# Altium PCB ecg-go_core.PcbDoc
Units mm, origin at the board's own origin, x right, y up, seen from the top; angles counter-clockwise.
Board outline 37 x 40 mm, 4 copper layers (Top Layer, L1, L2, Bottom Layer), stack 1.634 mm thick; 84 components, 76 nets, 289 pads, 134 vias.
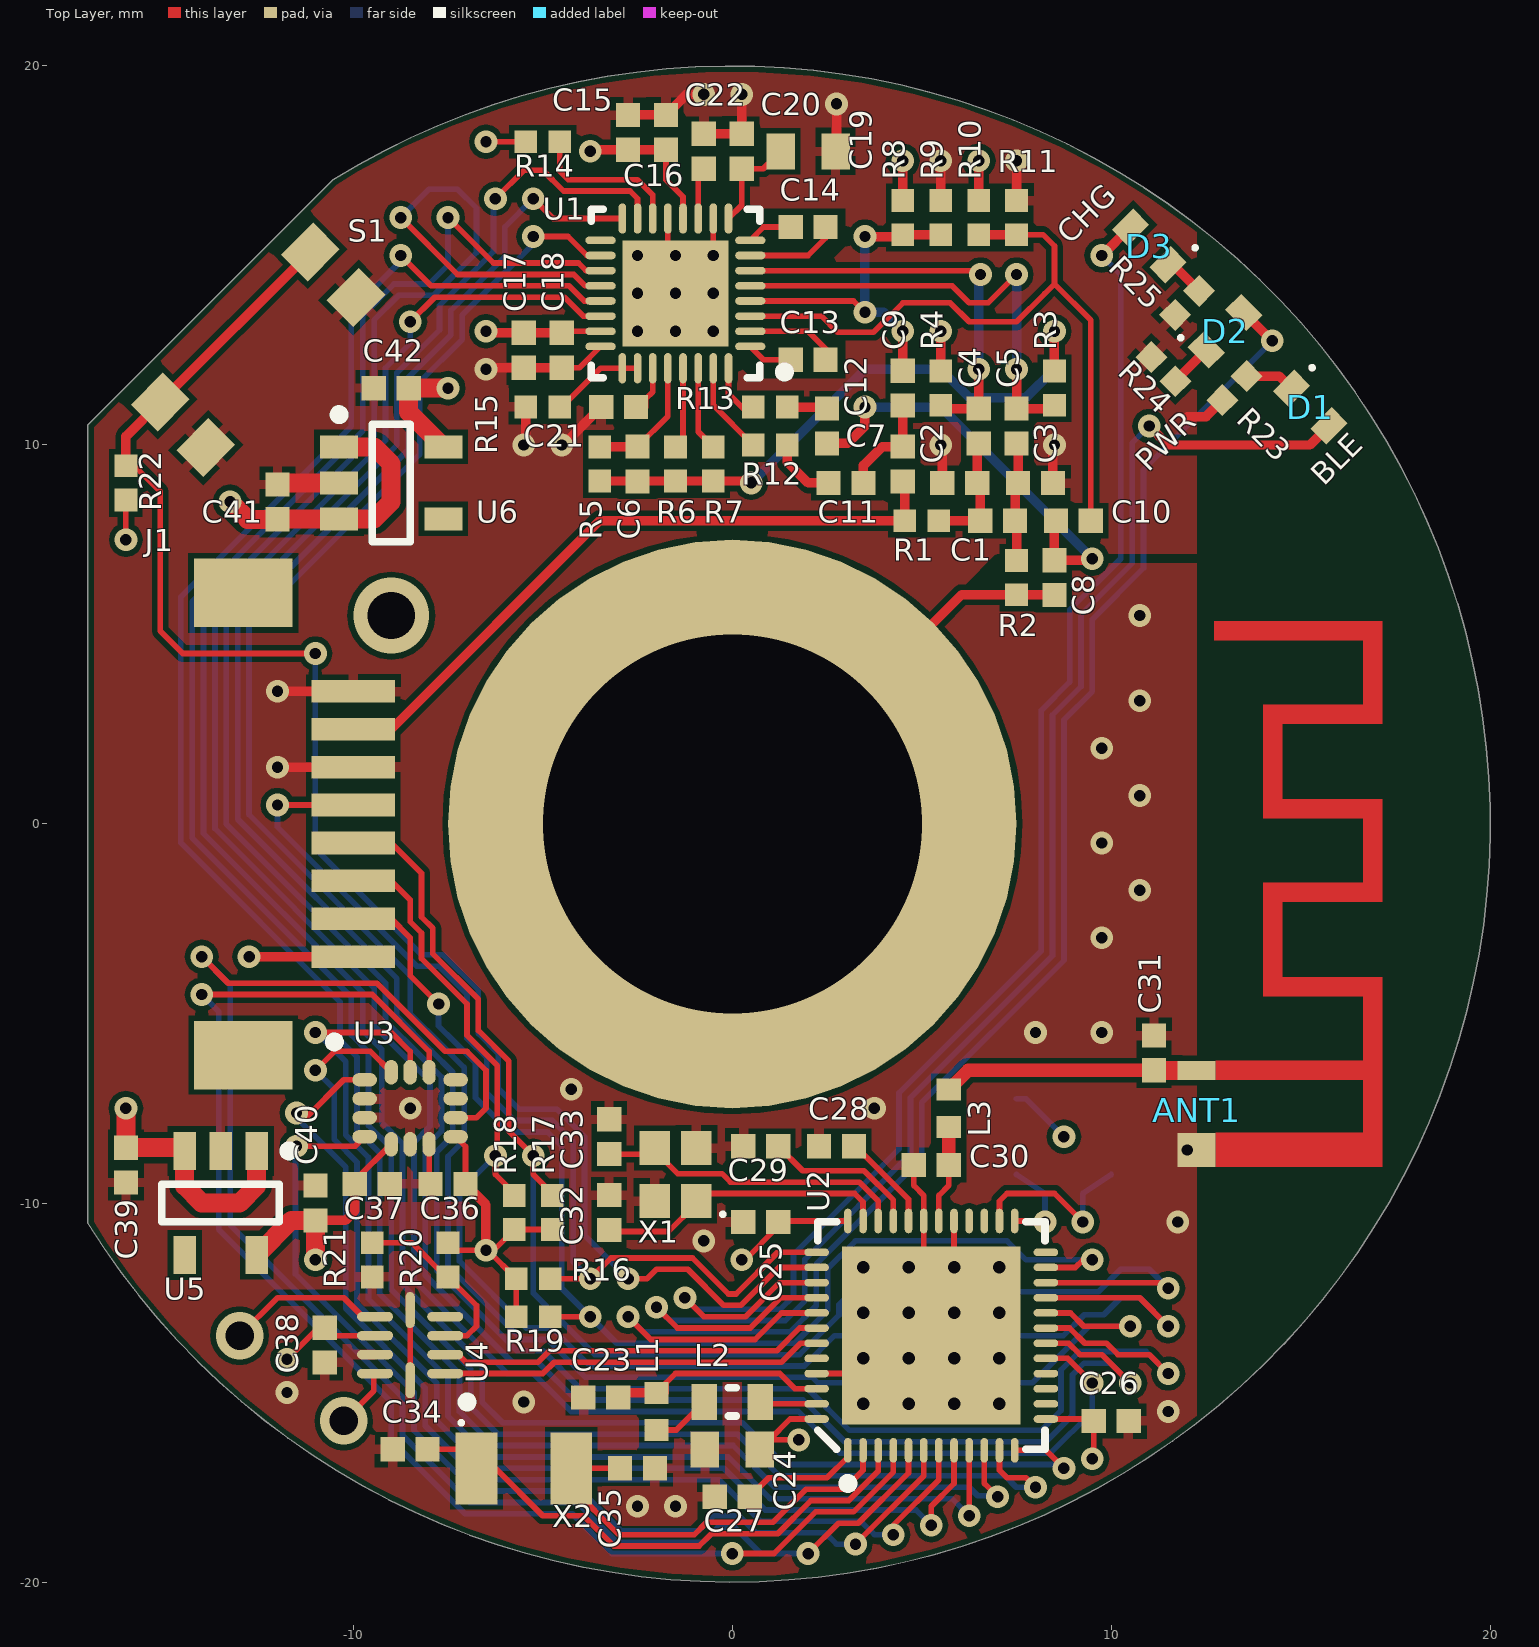
[diagram p0: Top Layer view]
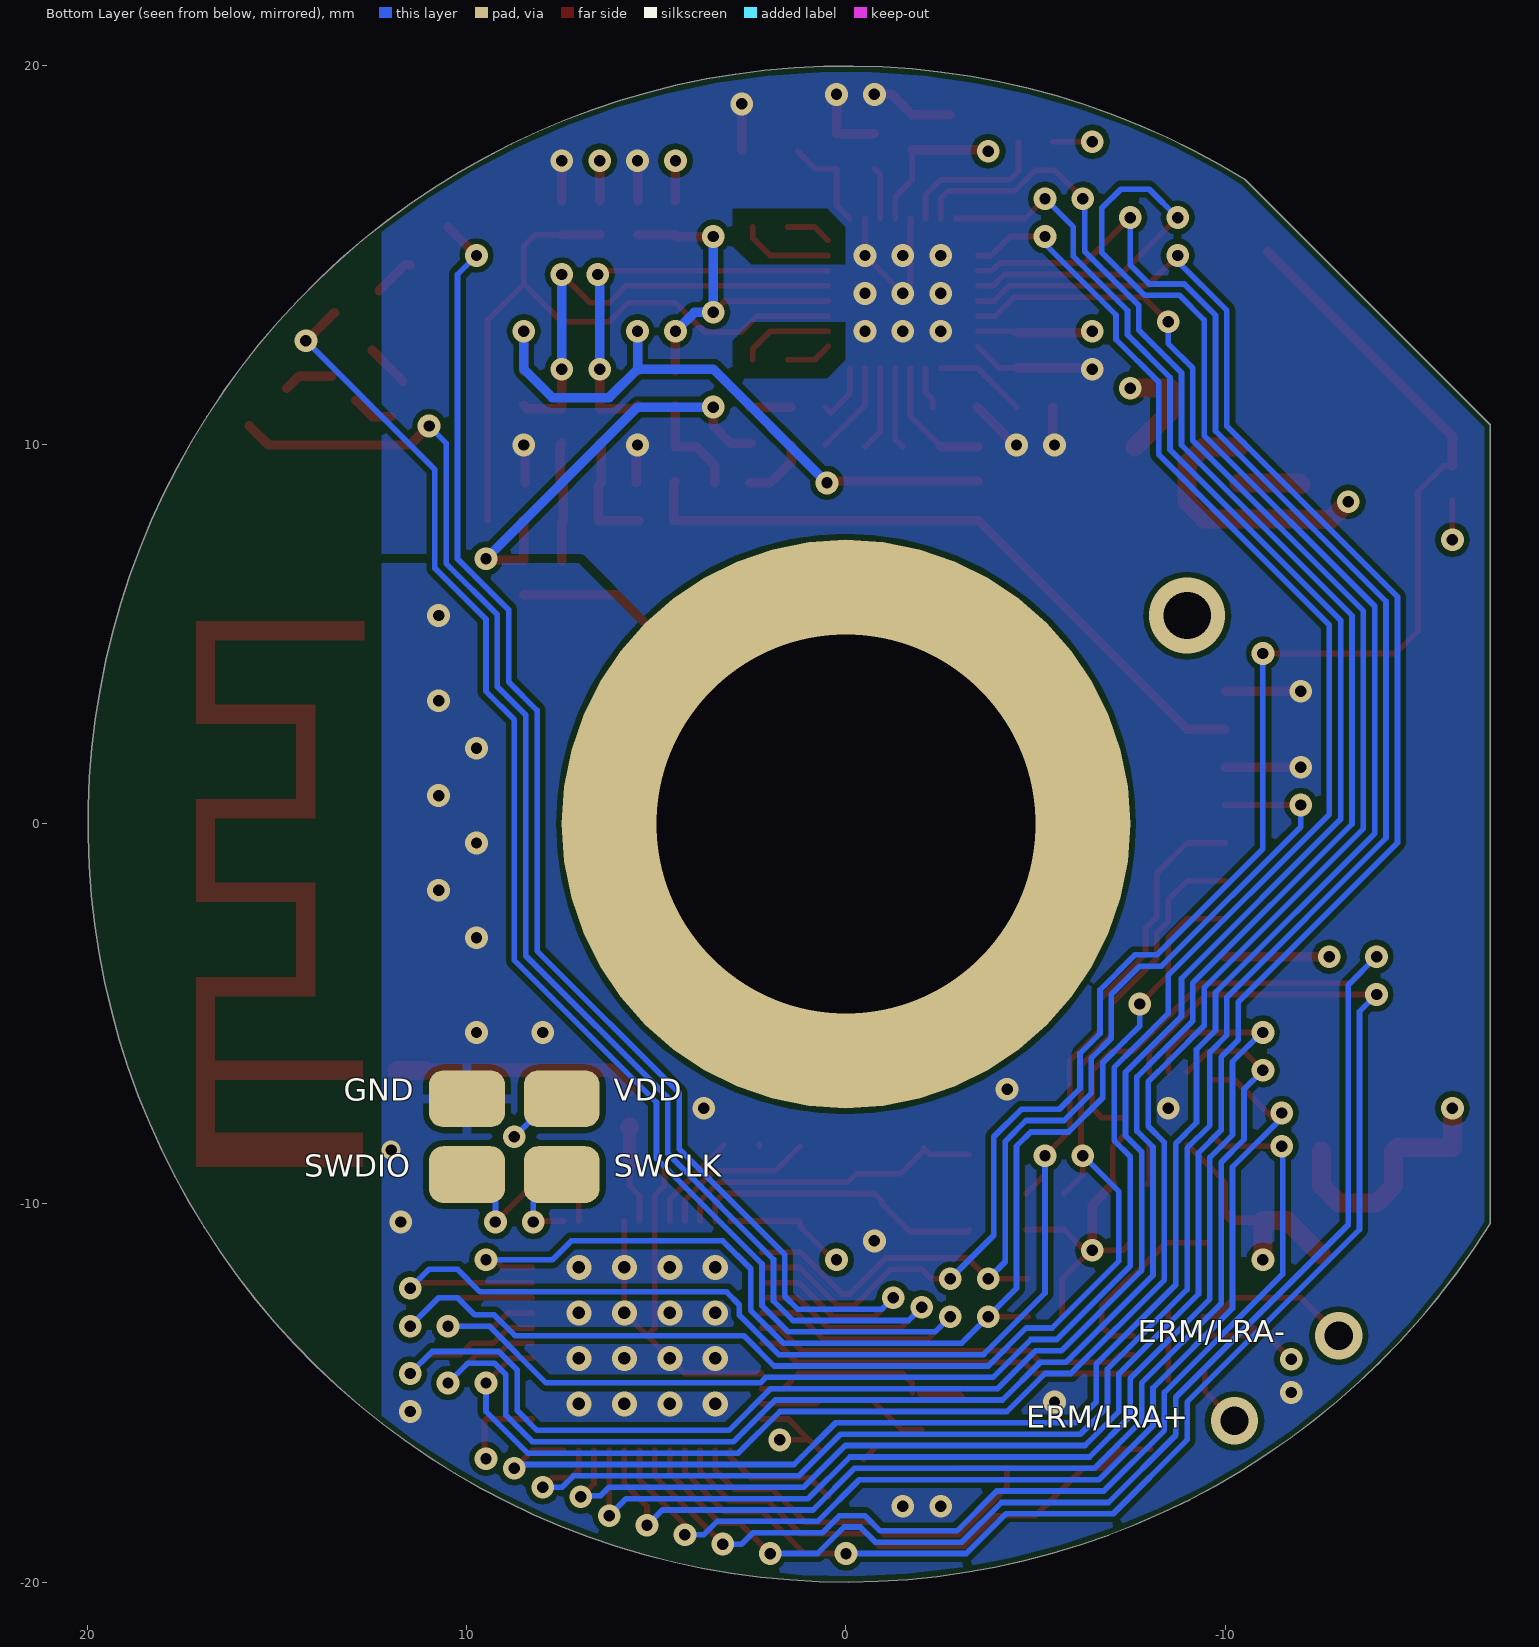
[diagram p1: Bottom Layer view, seen from below]
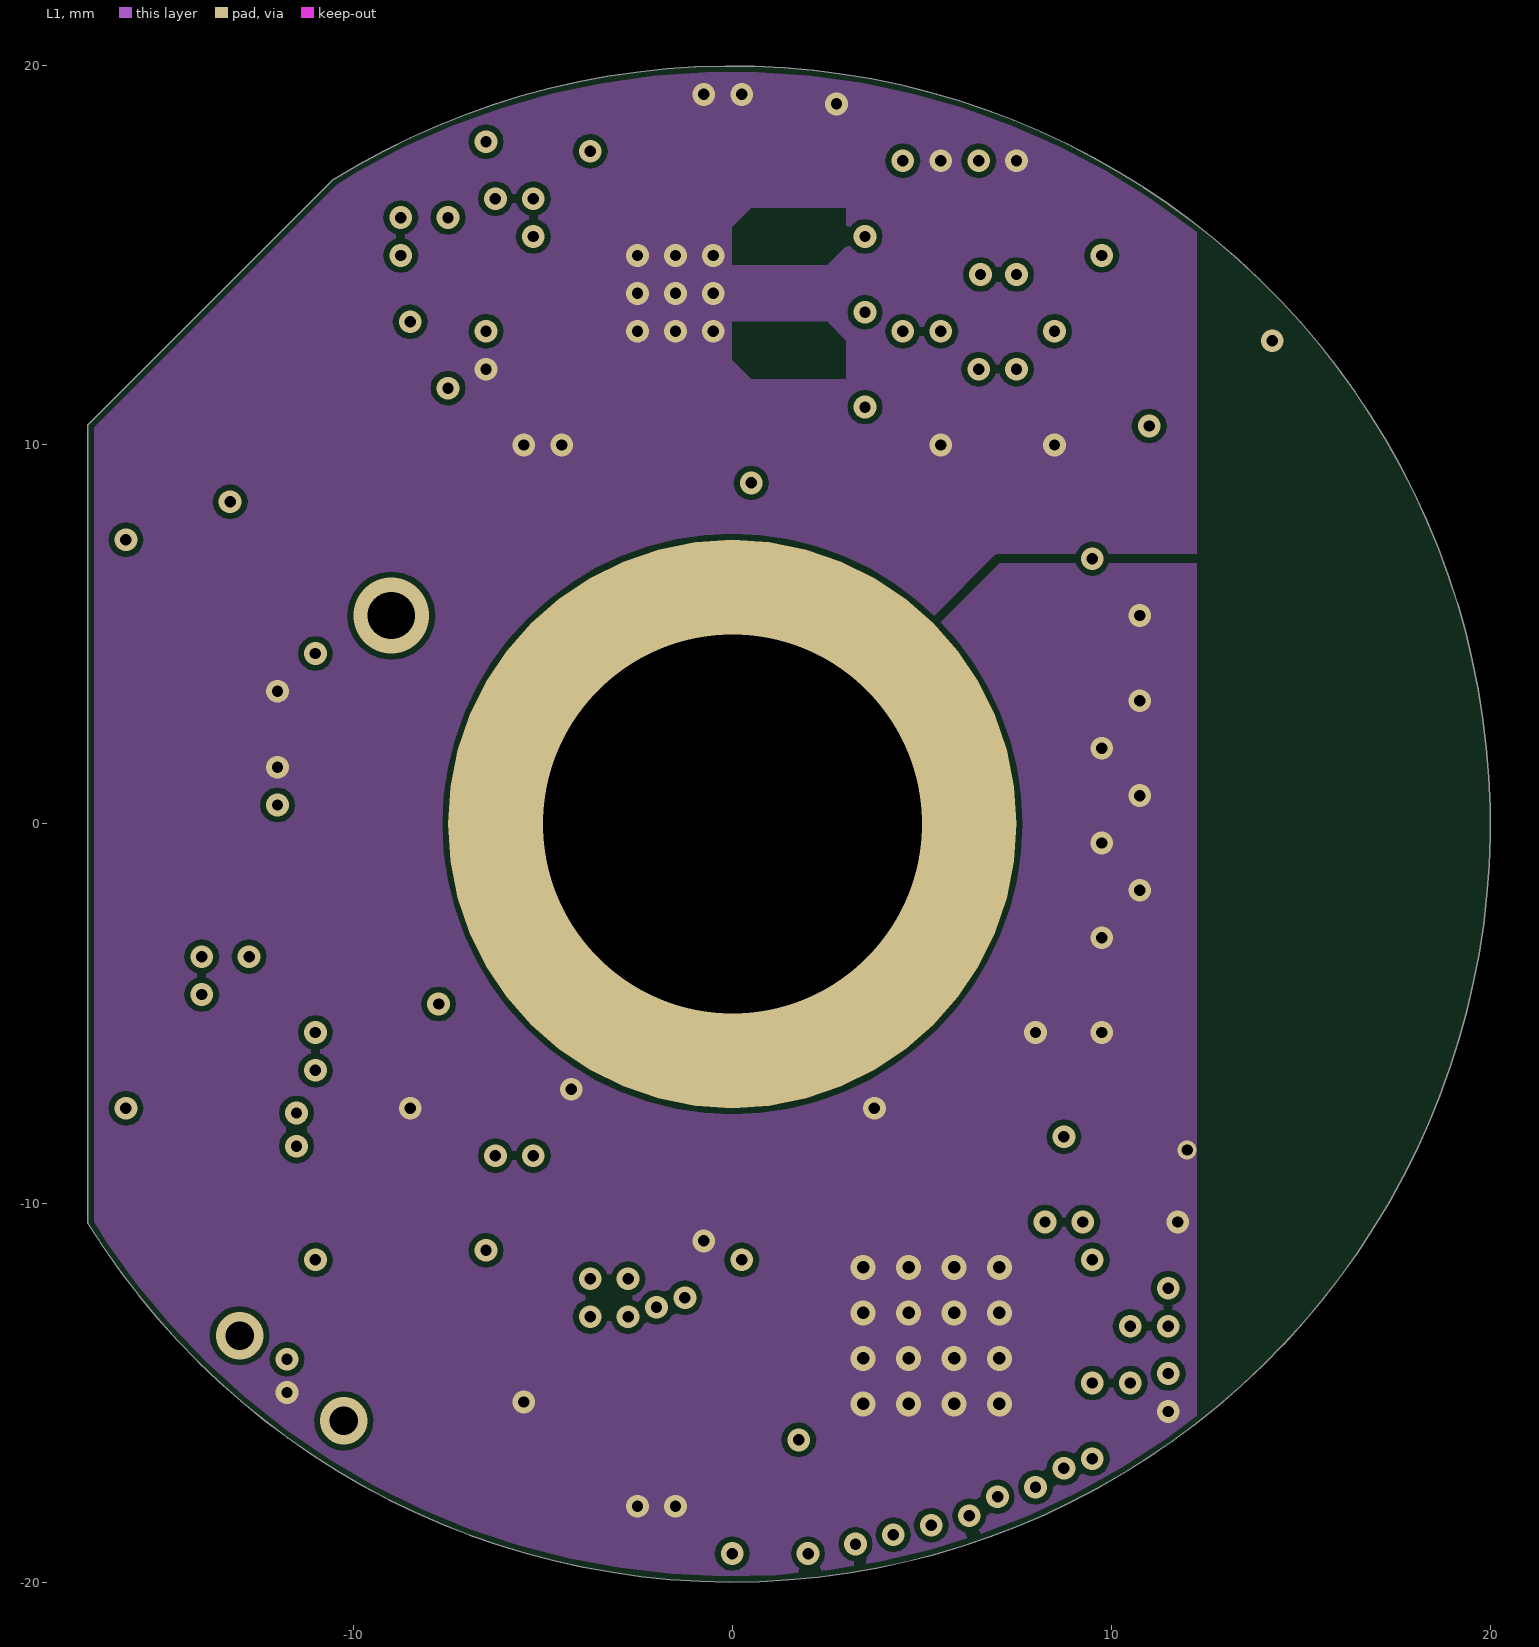
[diagram p2: L1]
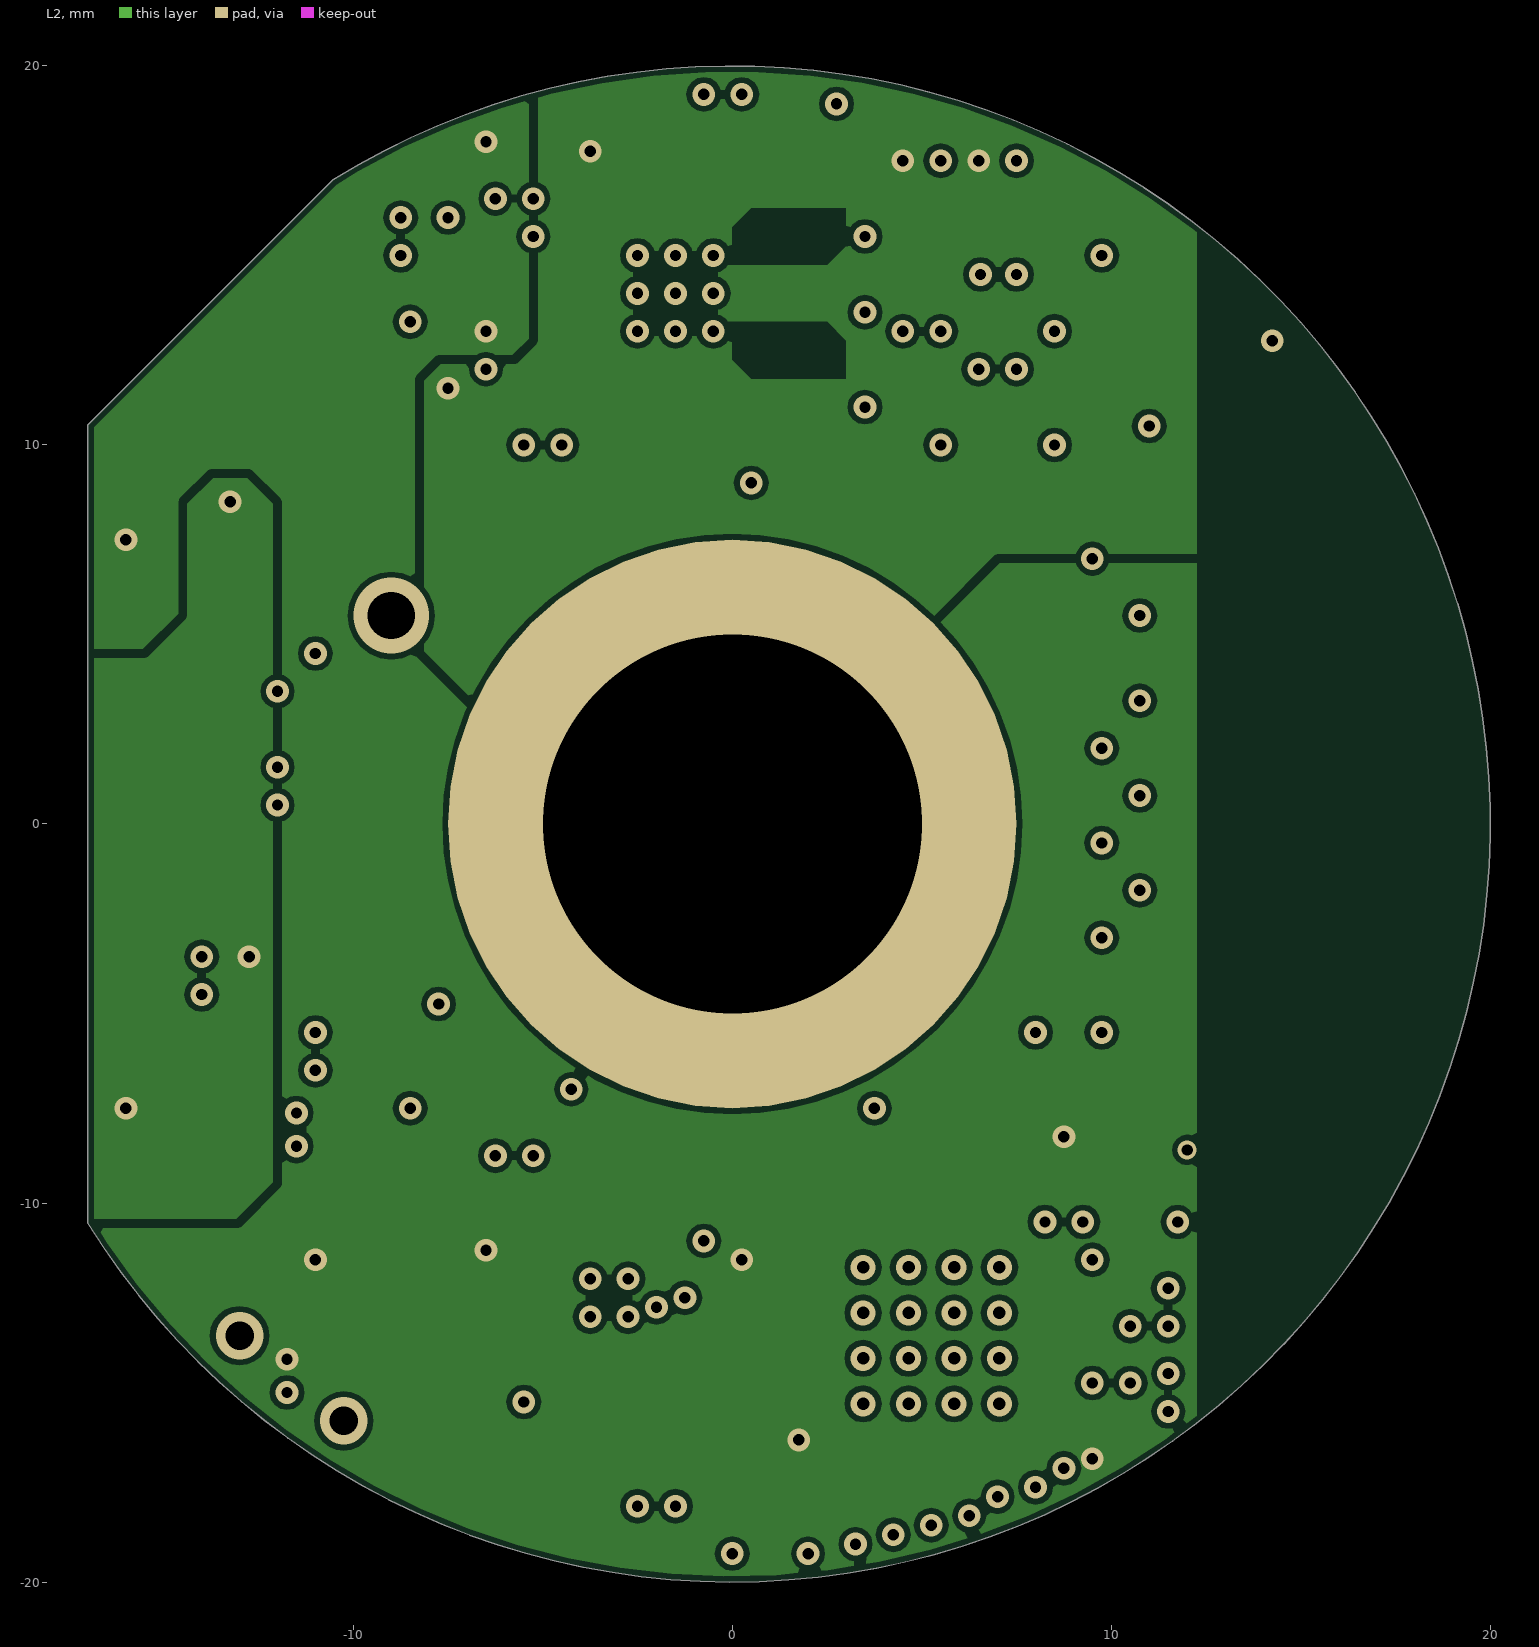
[diagram p3: L2]
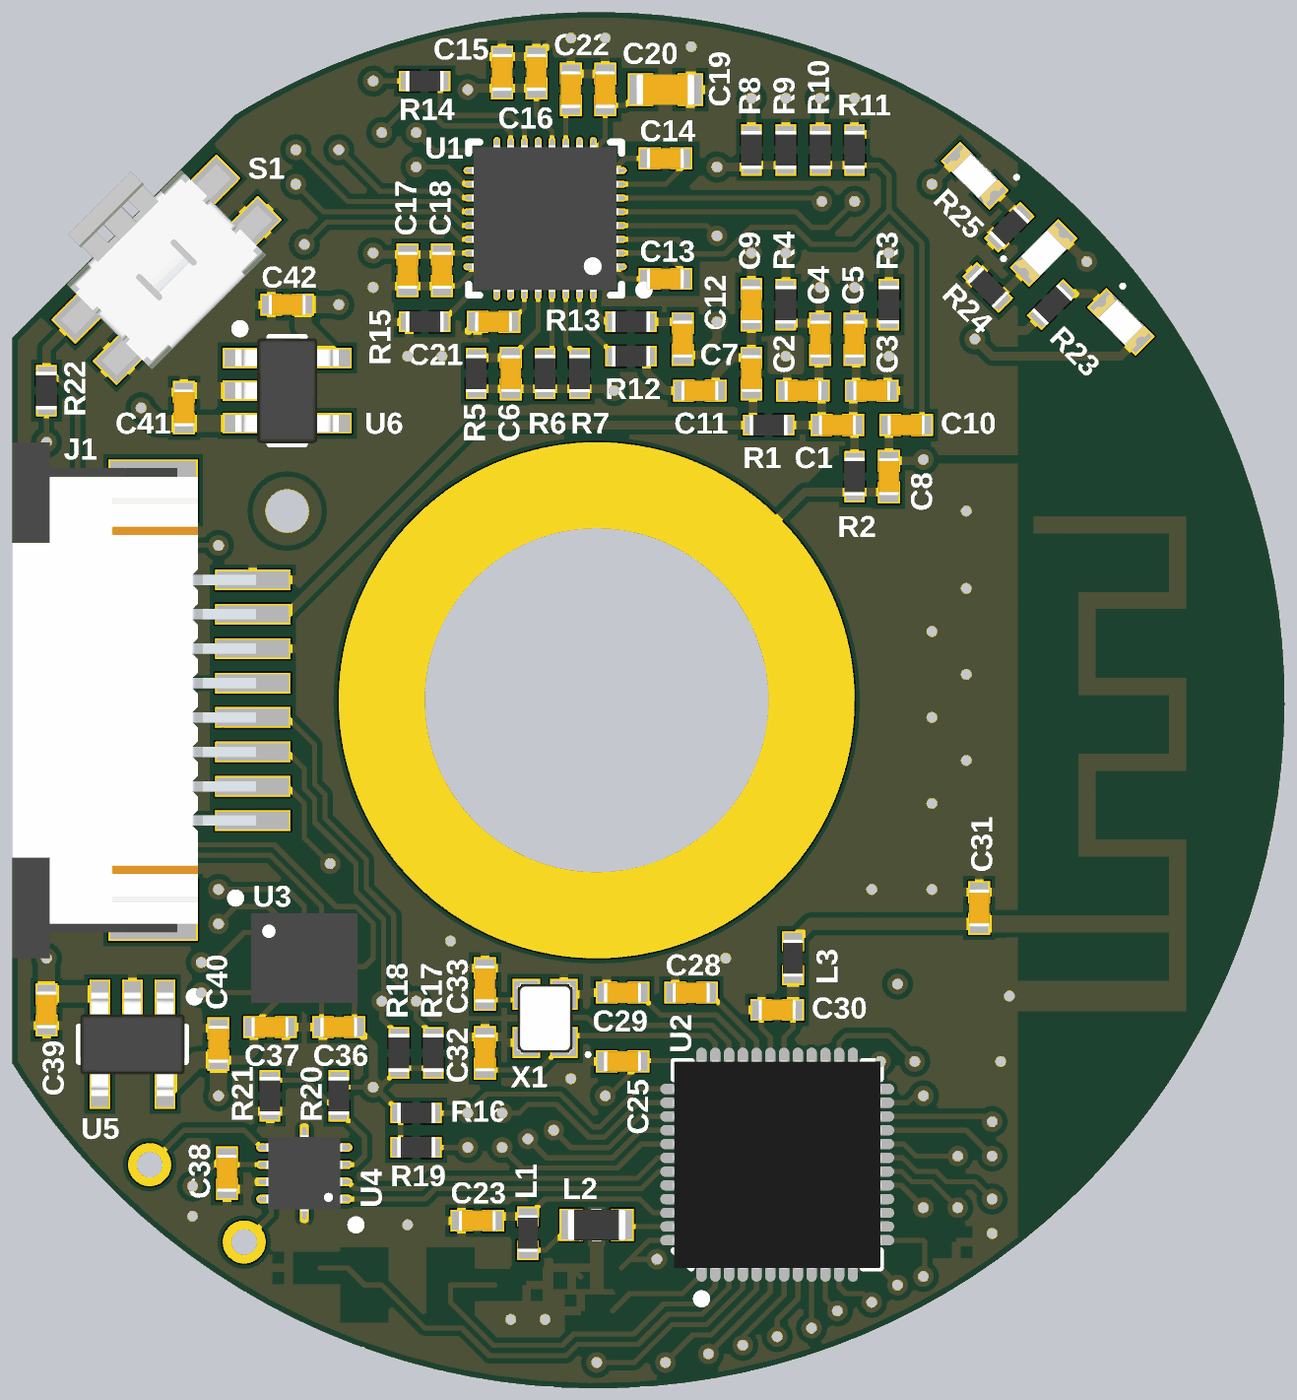
[diagram p4: 3D render of the assembled board from above, using the file's embedded part models]

## Layer stack, top to bottom
Top Solder: solder mask 0.0175, Solder Resist, Dk 3.5
Top Layer: signal copper 0.036
Dielectric 1: core 0.195, FR-4, Dk 4.2
L1: signal copper 0.036
Dielectric 3: prepreg 1.1, Dk 4.2
L2: signal copper 0.036
Dielectric 2: core 0.195, Dk 4.2
Bottom Layer: signal copper 0.036
Bottom Solder: solder mask 0.0175, Solder Resist, Dk 3.5

## Board outline
-17,-10.536 ccw(c0,0) -10.536,17 -17,10.536

## Design rules (kind name [scope] priority, off if disabled: settings)
BoardOutlineClearance [All] p1: gap=0.15
Clearance [All] p1: gap=0.15
ComponentClearance [All] p1: gap=0.25 collisioncheckmode=3 verticalgap=0.25 showdistances=TRUE
HoleSize [All] p1: absolutevalues=TRUE maxlimit=6.3 minlimit=0.3 maxpercent=80.000 minpercent=20.000
MinimumSolderMaskSliver [All] p1: minsoldermaskwidth=0.25
ParallelSegment [All] p1: limit=254 gap=0.254
PasteMaskExpansion [All] p1: expansion=0.05
PolygonConnect PolygonConnectANT [HasFootprint('ANT2.4GHZ_MIFA')] p1: connectstyle=Direct reliefconductorwidth=0.254 reliefentries=4 polygonreliefangle="90 Angle" airgapwidth=0.254
PolygonConnect PolygonConnectVias [IsVia] p2: connectstyle=Direct reliefconductorwidth=0.254 reliefentries=4 polygonreliefangle="90 Angle" airgapwidth=0.254
PolygonConnect [All] p3: connectstyle=Relief reliefconductorwidth=0.25 reliefentries=4 polygonreliefangle="90 Angle" airgapwidth=0.15
RoutingVias [All] p1: holewidth=0.3 width=0.6 viastyle="Through Hole" minholewidth=0.3 minwidth=0.6 maxholewidth=6.3 maxwidth=10.6
SilkToSilkClearance [All] p1: silktosilkclearance=0.25
SilkToSolderMaskClearance [IsPad] p1: minsilkscreentomaskgap=0.25 clearancetoexposedcopper=TRUE
SolderMaskExpansion [All] p1: expansion=0.05
Width [All] p1: maxlimit=10 minlimit=0.15 preferedwidth=0.25
24 further rules are at their usual default settings.

## Classes and differential pairs
component class U_supply: C39 C40 C41 C42 U5 U6
component class U_interface: C38 D1 D2 D3 D5 D6 D? R20 R21 R22 R23 R24 R25 R? S1 U4 U?
component class U_afe: C1 C2 C3 C4 C5 C6 C7 C8 C9 C10 C11 C12 C13 C14 C15 C16 C17 C18 C19 C20 C21 C22 R1 R2 R3 R4 R5 R6 R7 R8 R9 R10 R11 R12 R13 R14 R15 U1
component class U_controller: ANT1 C23 C24 C25 C26 C27 C28 C29 C30 C31 C32 C33 C34 C35 L1 L2 L3 R16 R17 R18 R19 U2 X1 X2 X?
component class U_imu: C36 C37 U3
component class core: J1

## Components (designator, comment, footprint, x,y, rotation, side; value= is the part's Value field where it differs from the comment)
ANT1 "2.4 GHz" ANT2.4GHZ_MIFA 12.25,-6.5 r90 top net-tie
C1 "2.2n" C0402 7,8 r0 top
C2 "100p" C0402 6,9 r180 top
C3 "100p" C0402 8,9 r180 top
C4 "1u" C0402 6.5,10.5 r90 top
C5 "1u" C0402 7.5,10.5 r90 top
C6 "1.5n" C0402 -2.5,9.5 r90 top
C7 "0.1u" C0402 4.5,9.5 r270 top
C8 "0.1u" C0402 8.5,6.5 r90 top
C9 "2.2n" C0402 4.5,11.5 r270 top
C10 "2.2n" C0402 9,8 r180 top
C11 "2.2n" C0402 3,9 r0 top
C12 "2.2n" C0402 2.5,10.5 r90 top
C13 "4.7n" C0402 2,12.25 r180 top
C14 "4.7n" C0402 2,15.75 r0 top
C15 "1u" C0402 -2.75,18.25 r270 top
C16 "0.1u" C0402 -1.75,18.25 r270 top
C17 "1u" C0402 -5.5,12.5 r90 top
C18 "0.1u" C0402 -4.5,12.5 r90 top
C19 "10u" C0603 2,17.75 r180 top
C20 "0.1u" C0402 0.25,17.75 r270 top
C21 "1u" C0402 -3,11 r0 top
C22 "1u" C0402 -0.75,17.75 r270 top
C23 "1u" C0402 -3.47,-15.129 r0 top
C24 "4.7u" C0603 0,-16.5 r0 top
C25 "100n" C0402 0.75,-10.5 r0 top
C26 "100n" C0402 10,-15.75 r180 top
C27 "100n" C0402 0,-17.75 r0 top
C28 "100p" C0402 2.75,-8.5 r0 top
C29 "100p" C0402 0.75,-8.5 r0 top
C30 "0.8p" C0402 5.25,-9 r180 top
C31 "0.8p" C0402 11.125,-6.04 r90 top
C32 "12p" C0402 -3.25,-10.25 r270 top
C33 "12p" C0402 -3.25,-8.25 r270 top
C34 "12p" C0402 -8.5,-16.5 r0 top
C35 "12p" C0402 -2.5,-17 r180 top
C36 "0.1u" C0402 -7.5,-9.5 r0 top
C37 "0.1u" C0402 -9.5,-9.5 r180 top
C38 "0.1u" C0402 -10.75,-13.75 r90 top
C39 "1u" C0402 -16,-9 r90 top
C40 "1u" C0402 -11,-10 r270 top
C41 "1u" C0402 -12,8.5 r270 top
C42 "1u" C0402 -9,11.5 r0 top
D1 "BLE" "WL-SMCW 0603" 15.25,11 r315 top
D2 "PWR" "WL-SMCW 0603" 13,13 r45 top
D3 "CHG" "WL-SMCW 0603" 11,15.25 r135 top
J1 "FFC Conn" WE68610814122 -17,0 r270 top
L1 "15n" L0402 -2,-15.5 r90 top
L2 "10u" L0603 0,-15.25 r180 top
L3 "3.9n" L0402 5.71,-7.5 r90 top
R1 "40.2k" R0402 5,8 r180 top
R2 "40.2k" R0402 7.5,6.5 r270 top
R3 "4.7M" R0402 8.5,11.5 r270 top
R4 "4.7M" R0402 5.5,11.5 r270 top
R5 "0" R0402 -3.5,9.5 r90 top
R6 "10M" R0402 -1.5,9.5 r90 top
R7 "0" R0402 -0.5,9.5 r270 top
R8 "10M" R0402 4.5,16 r90 top
R9 "10M" R0402 5.5,16 r90 top
R10 "10M" R0402 6.5,16 r90 top
R11 "10M" R0402 7.5,16 r90 top
R12 "40.2k" R0402 1,10 r0 top
R13 "40.2k" R0402 1,11 r0 top
R14 "40.2k" R0402 -5,18 r180 top
R15 "40.2k" R0402 -5,11 r0 top
R16 "10k" R0402 -5.25,-12 r180 top
R17 "10k" R0402 -4.75,-10.25 r270 top
R18 "10k" R0402 -5.75,-10.25 r270 top
R19 "10k" R0402 -5.25,-13 r180 top
R20 "10M" R0402 -7.5,-11.5 r90 top
R21 "0" R0402 -9.5,-11.5 r90 top
R22 "100k" R0402 -16,9 r270 top
R23 "1k" R0402 13.25,11.5 r45 top
R24 "4.7k" R0402 11.375,12 r315 top
R25 "4.7k" R0402 12,13.75 r45 top
S1 "WE434351045816" WE434351045816 -13.75,13.75 r225 top
U1 "ADS1292R" ADS129x_QFN -1.5,14 r180 top
U2 "nRF52832-QFAA" QFN40P600X600X90-48N 5.25,-13.5 r90 top
U3 "LSM6DS3" LSM6DS3 -8.5,-7.5 r0 top
U4 "DRV2603" DRV2603 -8.5,-13.75 r180 top
U5 "LP5907-3.3" LP5907 -13.5,-10 r270 top
U6 "LP5907-3.3" LP5907 -9,9 r0 top
X1 "32 MHz" CX2016DB32000D0FLJCC -1.5,-9.25 r90 top
X2 "32.768 kHz" ABS07-32.768KHZ-9-T -5.5,-17 r0 top

## Footprints (in the part's own frame and the unit in brackets; to place one, negate y for a bottom-side part, rotate by r counter-clockwise, add the part's x,y. Pads: shape width x height; smd on the part's side, far side on the other; paste and mask are expansions set on the pad)
ABS07-32.768KHZ-9-T [mm] "Crystal - 32.768 kHz, 9 pF, 70 kOhm"
  rect 1.1x1.9 smd paste-0.05 mask+0.05: 1(-1.25,0) 2(1.25,0)
  silkscreen extent -1.7,1.15 -1.6,1.25, body extent -1.6,-0.75 1.6,0.75, height 0.88
ADS129x_QFN [mm] "QFN, 32-Leads, Body 4,00x4,00mm, Pitch 0,40mm, Thermal Pad 2,80x2,80mm, IPC Medium Density"
  oval 0.8x0.2 smd paste-0.04 mask+0.05: 1(-1.975,1.4) 2(-1.975,1) 3(-1.975,0.6) 4(-1.975,0.2) 5(-1.975,-0.2) 6(-1.975,-0.6) 7(-1.975,-1) 8(-1.975,-1.4) 17(1.975,-1.4) 18(1.975,-1) 19(1.975,-0.6) 20(1.975,-0.2) 21(1.975,0.2) 22(1.975,0.6) 23(1.975,1) 24(1.975,1.4)
  oval 0.2x0.8 smd paste-0.04 mask+0.05: 9(-1.4,-1.975) 10(-1,-1.975) 11(-0.6,-1.975) 12(-0.2,-1.975) 13(0.2,-1.975) 14(0.6,-1.975) 15(1,-1.975) 16(1.4,-1.975) 25(1.4,1.975) 26(1,1.975) 27(0.6,1.975) 28(0.2,1.975) 29(-0.2,1.975) 30(-0.6,1.975) 31(-1,1.975) 32(-1.4,1.975)
  rect 2.8x2.8 smd paste-2.8 mask+0.05: 33(0,0)
  silkscreen extent -3,-2.22 2.22,2.22, body extent -2.12,-2.12 2.12,2.12, height 1
ANT2.4GHZ_MIFA [mm] "Antenna - Meandered Inverted F Antenna (IFA)"
  rect 0.5x1 smd paste-0.5: 1(0,0)
  rect 0.9x1 smd paste-0.9: 2(-2.1,0)
  Top Layer region: -2.55,-0.5 -2.55,-4.9 2.45,-4.9 2.45,-2.26 4.45,-2.26 4.45,-4.9 7.15,-4.9 7.15,-2.26 9.15,-2.26 9.15,-4.9 11.85,-4.9 11.85,-0.46 11.35,-0.46 11.35,-4.4 9.65,-4.4 9.65,-1.76 6.65,-1.76 6.65,-4.4 4.95,-4.4 4.95,-1.76 1.95,-1.76 1.95,-4.4 0.25,-4.4 0.25,-0.5 -0.25,-0.5 -0.25,-4.4 -1.65,-4.4 -1.65,-0.5
C0402 [mm] "Chip Capacitor, 2-Leads, Body 1,00x0,50mm, IPC Medium Density"
  rect 0.64x0.64 smd paste-0.05 mask+0.05: 1(-0.46,0) 2(0.46,0)
  body extent -0.55,-0.3 0.55,0.3, height 0.4
C0603 [mm] "Chip Capacitor, 2-Leads, Body 1,60x0,80mm, IPC Medium Density"
  rect 0.75x0.95 smd paste-0.05 mask+0.05: 1(-0.725,0) 2(0.725,0)
  body extent -0.85,-0.45 0.85,0.45, height 0.5
CX2016DB32000D0FLJCC [mm] "Crystal - 32 MHz, 8 pF, 80 ohm"
  rect 0.9x0.8 smd paste-0.05 mask+0.05: 1(-0.7,-0.55) 2(0.7,-0.55) 3(0.7,0.55) 4(-0.7,0.55)
  silkscreen extent -1.1,-1.3 -1,-1.2, body extent -1.02,-0.82 1.03,0.83, height 0.39
DRV2603 [mm] "IC - Haptic Drive, ERM/LRA, Auto Resonance"
  oval 0.95x0.25 smd paste-0.05 mask+0.05: 1(-0.925,0.75) 2(-0.925,0.25) 3(-0.925,-0.25) 4(-0.925,-0.75) 6(0.925,-0.75) 7(0.925,-0.25) 8(0.925,0.25) 9(0.925,0.75)
  oval 0.25x0.95 smd paste-0.05 mask+0.05: 5(0,-0.925) 10(0,0.925)
  silkscreen extent -1.63,1.38 -1.38,1.62, body extent -1.1,-1.1 1.1,1.1, height 0.8
L0402 [mm] "Chip Inductor, 2-Leads, Body 1,00x0,50mm, IPC Medium Density"
  rect 0.58x0.64 smd paste-0.05 mask+0.05: 1(-0.49,0) 2(0.49,0)
  body extent -0.55,-0.3 0.55,0.3, height 0.4
L0603 [mm] "Chip Inductor, 2-Leads, Body 1,60x0,80mm, IPC Medium Density"
  rect 0.68x0.94 smd paste-0.05 mask+0.05: 1(-0.74,0) 2(0.74,0)
  silkscreen extent -0.1,-0.37 0.1,0.37, body extent -0.85,-0.45 0.85,0.45, height 0.5
LP5907 [mm] "SOT23, 5-Leads, Body 2,90x2,80mm, Pitch 0,95mm, IPC Medium Density"
  rect 1x0.6 smd paste-0.05 mask+0.05: 1(-1.375,0.95) 2(-1.375,0) 3(-1.375,-0.95) 4(1.375,-0.95) 5(1.375,0.95)
  silkscreen extent -1.5,-1.55 0.5,1.93, body extent -1.5,-1.53 1.5,1.53, height 1.45
LSM6DS3 [mm] "IC - Inertial Measurement Unit, Accelerometer, Gyroscope, 6D"
  oval 0.65x0.35 smd paste-0.05 mask+0.025: 1(-1.2,0.75) 2(-1.2,0.25) 3(-1.2,-0.25) 4(-1.2,-0.75) 8(1.2,-0.75) 9(1.2,-0.25) 10(1.2,0.25) 11(1.2,0.75)
  oval 0.35x0.65 smd paste-0.05 mask+0.025: 5(-0.5,-0.95) 6(0,-0.95) 7(0.5,-0.95) 12(0.5,0.95) 13(0,0.95) 14(-0.5,0.95)
  silkscreen extent -2.12,1.63 -1.88,1.87, body extent -1.55,-1.3 1.55,1.3, height 0.86
QFN40P600X600X90-48N [mm]
  oval 0.65x0.2 smd: 1(-3.025,2.2) 2(-3.025,1.8) 3(-3.025,1.4) 4(-3.025,1) 5(-3.025,0.6) 6(-3.025,0.2) 7(-3.025,-0.2) 8(-3.025,-0.6) 9(-3.025,-1) 10(-3.025,-1.4) 11(-3.025,-1.8) 12(-3.025,-2.2) 25(3.025,-2.2) 26(3.025,-1.8) 27(3.025,-1.4) 28(3.025,-1) 29(3.025,-0.6) 30(3.025,-0.2) 31(3.025,0.2) 32(3.025,0.6) 33(3.025,1) 34(3.025,1.4) 35(3.025,1.8) 36(3.025,2.2)
  oval 0.2x0.65 smd: 13(-2.2,-3.025) 14(-1.8,-3.025) 15(-1.4,-3.025) 16(-1,-3.025) 17(-0.6,-3.025) 18(-0.2,-3.025) 19(0.2,-3.025) 20(0.6,-3.025) 21(1,-3.025) 22(1.4,-3.025) 23(1.8,-3.025) 24(2.2,-3.025) 37(2.2,3.025) 38(1.8,3.025) 39(1.4,3.025) 40(1,3.025) 41(0.6,3.025) 42(0.2,3.025) 43(-0.2,3.025) 44(-0.6,3.025) 45(-1,3.025) 46(-1.4,3.025) 47(-1.8,3.025) 48(-2.2,3.025)
  rect 4.7x4.7 smd: 49(0,0)
  silkscreen extent -4.02,-3 3,3, body extent -3.02,-3.02 3.02,3.02, height 0.86
R0402 [mm] "Chip Resistor, 2-Leads, Body 1,00x0,50mm, IPC Medium Density"
  rect 0.6x0.6 smd paste-0.05 mask+0.05: 1(-0.45,0) 2(0.45,0)
  body extent -0.55,-0.3 0.55,0.3, height 0.4
WE68610814122 [mm] "Conn - FFC, 8 Pin, 1 mm Pitch, Bottom Contacts, SMD, Right Angle, Slide Lock"
  rect 0.6x2.2 smd paste-0.05 mask+0.05: 1(-3.5,7) 2(-2.5,7) 3(-1.5,7) 4(-0.5,7) 5(0.5,7) 6(1.5,7) 7(2.5,7) 8(3.5,7)
  rect 1.8x2.6 smd paste-0.05 mask+0.05: ""(-6.1,4.1) ""(6.1,4.1)
  body extent -7.5,0 7.5,7.1, height 3.01
WE434351045816 [mm] "Switch - Tactile, Off-Mom, SPST, Side-Actuated"
  rect 1.2x1 smd paste-0.05 mask+0.05: 1(2.8,2.6) 2(2.8,0.9) 3(-2.8,2.6) 4(-2.8,0.9)
  body extent -3.2,-1 3.2,3.5, height 1.64
"WL-SMCW 0603" [mm] "Chip Diode, 2-Leads, Body 1,60x0,80mm, IPC Medium Density"
  rect 0.6x0.8 smd paste-0.05 mask+0.05: 1(-0.7,0) 2(0.7,0)
  silkscreen extent -0.75,0.72 -0.65,0.82, body extent -0.8,-0.4 0.8,0.4, height 0.7

## Part data
ANT1: library part "Antenna 2.4 GHz", "Antenna - Meandered Inverted F Antenna (IFA)"
C1 C2 C3 C4 C5 C6 C7 C8 C9 C10 C11 C12 C13 C14 C15 C16 C17 C18 C19 C20 C21 C22 C23 C24 C25 C26 C27 C28 C29 C30 C31 C32 C33 C34 C35 C36 C37 C38 C39 C40 C41 C42: library part Capacitor, "Capacitor"
D1: library part 150060BS75000, "LED - Blue, 3.2V, 0603"
D2: library part 150060VS75000, "LED - Green, 2V, 0603"
D3: library part 150060YS75000, "LED - Yellow, 2V, 0603"
J1: library part WE68610814122, "Conn - FFC, 8 Pin, 1 mm Pitch, Top Contacts, SMD, Right Angle, Slide Lock"
L1 L2 L3: library part Inductor, "Inductor"
R1 R2 R3 R4 R5 R6 R7 R8 R9 R10 R11 R12 R13 R14 R15 R16 R17 R18 R19 R20 R21 R22 R23 R24 R25: library part Resistor, "Resistor"
S1: "Switch - Tactile, Off-Mom, SPST, Side-Actuated"
U1: "IC - Analog Front End - Medical"
U2: "Multi-protocol Bluetooth Low Energy, ANT and 2.4GHz proprietary system-on-chip"
U3: "IC - Inertial Measurement Unit, Accelerometer, Gyroscope, 6D"
U4: "IC - Haptic Drive, ERM/LRA, Auto Resonance"
U5 U6: "IC - Voltage Regulator, Linear"
X1: library part CX2016DB32000D0FLJCC, "Crystal - 32 MHz, 8 pF, 80 ohm"
X2: library part ABS07-32.768KHZ-9-T, "Crystal - 32.768 kHz, 9 pF, 70 kOhm"

## Free pads (board coordinates)
  round 15 hole 10: ""(0,0)
  rrect50% 2x1.5 smd far side paste-0.05 mask+0.05: ""(7.5,-9.25) ""(7.5,-7.25) ""(10,-9.25) ""(10,-7.25)

## Via types
v1: diameter 0.6, hole 0.3, Top Layer to Bottom Layer, tented both sides, 93 vias
v2: diameter 0.6, hole 0.3, Top Layer to Bottom Layer, tented top, 21 vias
v3: diameter 0.66, hole 0.33, Top Layer to Bottom Layer, tented both sides, 16 vias
v4: diameter 1.25, hole 0.75, Top Layer to Bottom Layer, 2 vias
v5: diameter 0.5, hole 0.3, Top Layer to Bottom Layer, tented both sides, 1 vias
v6: diameter 2, hole 1.25, Top Layer to Bottom Layer, 1 vias

## Nets (pads, with @x,y where several pads share a name; then routed paths per layer and width w, separated by ;. In a path a pad name is that pad's centre, name@x,y a point inside that pad or via, vN(x,y) a via of type N, cw(c..) or ccw(c..) an arc to the next point about the centre after c; other vN are vias at no path point)
AFE_CLK: U1.17
AFE_CLKSEL: R14.1 U1.14 | length 4.1
  Top Layer w0.15: R14.1 -4.55,17.224 -4.326,17 -2.5,17 -2.1,16.6 U1.14
AFE_CS: U1.18 U2.20 | length 57
  Top Layer w0.15: v1(-5.25,15.5) -4.335,15.5 -3.835,15 U1.18 ; U2.20 8.923,-12.9 9.273,-13.25 v2(10.5,-13.25)
  Bottom Layer w0.15: v1(-5.25,15.5) -5.25,15.303 -7.125,13.428 -7.125,12.784 -8.25,11.659 -8.25,9.75 -12.75,5.25 -12.75,0.25 -8.5,-4 -8.5,-5 -7.649,-5.851 -7.075,-6.425 -7.075,-8.348 -7.5,-8.773 -7.5,-11.659 -5.559,-13.6 -4.877,-13.6 -3.877,-14.6 2.115,-14.6 2.26,-14.745 7.914,-14.745 9.409,-13.25 v2(10.5,-13.25)
AFE_DIN: U1.19 U2.11 | length 59.8
  Top Layer w0.15: v1(-7.5,16) -6.3,14.8 -4.059,14.8 -3.859,14.6 U1.19 ; U2.11 7.05,-17.05 7.25,-17.25 7.75,-17.25 v2(8,-17.5)
  Bottom Layer w0.15: v1(-7.5,16) -7.5,14.75 -8,14.25 -8.924,14.25 -9.75,13.424 -9.75,10.371 -14.25,5.871 -14.25,-0.371 -10.05,-4.571 -10.05,-5.571 -9.6,-6.021 -9.6,-7.953 -9,-8.553 -9,-12.28 -6.9,-14.38 -6.9,-15.38 -6.18,-16.1 0.146,-16.1 1.246,-17.2 7.192,-17.2 7.492,-17.5 v2(8,-17.5)
AFE_DOUT: U1.21 U2.10 | length 58.2
  Top Layer w0.15: v1(-8.75,15) -7.95,14.2 -4.307,14.2 -3.907,13.8 U1.21 ; U2.10 6.65,-17.4 v2(7,-17.75)
  Bottom Layer w0.15: v1(-8.75,15) -8.75,14.849 -10.05,13.549 -10.05,10.496 -14.55,5.996 -14.55,-0.496 -10.35,-4.696 -10.35,-5.696 -9.9,-6.146 -9.9,-8.077 -9.3,-8.677 -9.3,-12.404 -7.2,-14.504 -7.2,-15.504 -6.304,-16.4 0.021,-16.4 1.121,-17.5 6.25,-17.5 6.475,-17.725 6.975,-17.725 v2(7,-17.75)
AFE_DRDY: U1.22 U2.17 | length 57.9
  Top Layer w0.15: v1(-8.5,13.25) -7.85,13.9 -4.432,13.9 -3.932,13.4 U1.22 ; U2.17 8.85,-14.1 v2(9.5,-14.75)
  Bottom Layer w0.15: v1(-8.5,13.25) -8.5,12.682 -9.15,12.032 -9.15,10.123 -13.65,5.623 -13.65,-0.123 -9.45,-4.323 -9.45,-5.323 -8.549,-6.224 -7.975,-6.798 -7.975,-7.975 -8.4,-8.4 -8.4,-12.032 -5.932,-14.5 -5.25,-14.5 -4.25,-15.5 1.742,-15.5 2.842,-16.6 8.4,-16.6 9.5,-15.5 v2(9.5,-14.75)
AFE_ECG_BIAS: C6.1 R3.1 R4.1 R5.1 R6.1 R7.2 | length 18
  Top Layer w0.15: R5.1 R5.1@-3.49,9.04 ; C6.1 C6.1@-2.49,9.05
  Top Layer w0.25: R5.1@-3.49,9.05 C6.1@-2.5,9.05 ; C6.1@-2.49,9.05 R6.1 R7.2 0.45,9.05 v1(0.5,9) ; R4.1 v1(5.5,13) ; R3.1 v1(8.5,13)
  Bottom Layer w0.25: v1(0.5,9) 3.5,12 5.5,12 ; v1(5.5,13) 5.5,12 ; v1(8.5,13) 8.5,12 7.75,11.25 6.25,11.25 5.5,12
AFE_ELEC_LA: C8.1 pad.@0,0 R2.2 | length 12.5
  Top Layer w0.15: pad.@0,0 pad.@1.45,0
  Top Layer w0.25: pad.@0,0 6.05,6.05 R2.2 8.49,6.05 C8.1
AFE_ELEC_RA: C7.2 J1.2 R1.2 | length 17.9
  Top Layer w0.25: J1.2 -9,2.5 -3.5,8 R1.2 4.55,8.99 C7.2
AFE_GPIO: R15.2 U1.25 U1.26 | length 2.4
  Top Layer w0.15: R15.2@-4.5,11 -3.475,12.025 U1.25 U1.26
AFE_IN2N: C5.2 R3.2 U1.5 | length 12.1
  Top Layer w0.15: U1.5 5.8,14.2 6.25,13.75 6.75,13.75 v1(7.5,14.5)
  Top Layer w0.25: v1(7.5,12) C5.2 8.41,10.96 R3.2
  Bottom Layer w0.25: v1(7.5,12) v1(7.5,14.5)
AFE_IN2P: C4.2 R4.2 U1.6 | length 10.7
  Top Layer w0.15: U1.6 6.45,14.6 v1(6.55,14.5)
  Top Layer w0.25: R4.2 5.59,10.96 C4.2 v1(6.5,12)
  Bottom Layer w0.25: v1(6.5,12) 6.5,14.45 v1(6.55,14.5)
AFE_RESET: U1.15 U2.18 | length 63.6
  Top Layer w0.15: v1(-6.25,16.5) -5.5,17.25 -5,17.25 -4.45,16.7 -2.7,16.7 -2.5,16.5 U1.15 ; U2.18 8.874,-13.7 9.174,-14 9.75,-14 v2(10.5,-14.75)
  Bottom Layer w0.15: v1(-6.25,16.5) -6.3,16.45 -6.3,15.101 -7.725,13.676 -7.725,13.033 -8.85,11.908 -8.85,9.999 -13.35,5.499 -13.35,0.001 -9.15,-4.199 -9.15,-5.199 -8.249,-6.1 -7.675,-6.674 -7.675,-8.099 -8.1,-8.524 -8.1,-11.907 -5.807,-14.2 -5.126,-14.2 -4.126,-15.2 1.867,-15.2 2.967,-16.3 8.276,-16.3 8.975,-15.601 8.975,-14.533 9.283,-14.225 9.975,-14.225 10,-14.25 v2(10.5,-14.75)
AFE_RESP_BIAS_N: C10.1 R10.1 R11.1 U1.3 | length 18.9
  Top Layer w0.15: U1.3 2.35,13.4 2.775,12.975 3.725,12.975 4.5,13.75 5.75,13.75 6.25,13.25 7.5,13.25 8.25,14 8.5,14.25 ; R11.1 8.2,15.55 8.5,15.25 8.5,14.25 ; C10.1 9.46,13.29 8.5,14.25
  Top Layer w0.25: R10.1 R11.1
AFE_RESP_BIAS_P: C9.1 R8.1 R9.1 U1.4 | length 9.4
  Top Layer w0.15: U1.4 3.2,13.8 v1(3.5,13.5)
  Top Layer w0.25: v1(3.5,15.5) 4.45,15.5 R8.1 R9.1 ; C9.1 v1(4.5,13)
  Bottom Layer w0.25: v1(3.5,15.5) v1(3.5,13.5) 4,13.5 v1(4.5,13)
AFE_SCLK: U1.20 U2.12 | length 64.2
  Top Layer w0.15: v1(-8.75,16) -7.25,14.5 -4.183,14.5 -3.883,14.2 U1.20 ; U2.12 8.275,-16.525 v2(8.75,-17)
  Bottom Layer w0.15: v1(-8.75,16) -8,16.75 -7.25,16.75 -6.75,16.25 -6.75,15.076 -7.876,13.95 -8.8,13.95 -9.45,13.3 -9.45,10.247 -13.95,5.747 -13.95,-0.247 -9.75,-4.447 -9.75,-5.447 -9.25,-5.947 -9.25,-7.879 -8.7,-8.429 -8.7,-12.156 -6.6,-14.256 -6.6,-15.256 -6.056,-15.8 0.27,-15.8 1.37,-16.9 8.65,-16.9 v2(8.75,-17)
AFE_START: U1.16 U2.19 | length 63.1
  Top Layer w0.15: v1(-5.25,16.5) -4.725,15.975 U1.16 ; U2.19 8.899,-13.3 9.299,-13.7 9.874,-13.7 10.174,-14 11,-14 v2(11.5,-14.5)
  Bottom Layer w0.15: v1(-5.25,16.5) -6,15.75 -6,14.977 -7.425,13.552 -7.425,12.908 -8.55,11.783 -8.55,9.874 -13.05,5.374 -13.05,0.126 -8.85,-4.074 -8.85,-5.074 -7.949,-5.976 -7.375,-6.549 -7.375,-8.224 -7.8,-8.649 -7.8,-11.783 -5.683,-13.9 -5.001,-13.9 -4.001,-14.9 1.991,-14.9 3.091,-16 8.151,-16 8.675,-15.476 8.675,-14.408 9.164,-13.919 10.919,-13.919 v2(11.5,-14.5)
AFE_VCAP1: C22.2 U1.11 | length 1.4
  Top Layer w0.15: U1.11 -0.9,17.14 C22.2
AFE_VCAP2: C21.2 U1.27 | length 1.1
  Top Layer w0.15: C21.2@-2.29,11 -2.29,11.21 -2.1,11.4 U1.27
AFE_VREFP: C19.2 C20.2 U1.9 | length 2.7
  Top Layer w0.15: U1.9 0.25,16.325 C20.2 0.815,17.29 C19.2
AGND: ANT1.2 C2.2 C3.1 C15.1 C16.1 C17.1 C18.1 C19.1 C20.1 C21.1 C22.1 C23.1 C24.1 C25.1 C26.1 C27.1 C28.1 C29.1 C30.2 C31.2 C32.1 C33.1 C34.1 C35.1 C36.1 C37.1 C38.1 C39.1 C40.1 C41.1 C42.1 J1.1 J1.3 pad.@10,-7.25 R9.2 R11.2 R15.1 R21.1 R23.1 R24.1 R25.1 S1.1 S1.3 U1.10 U1.13 U1.24 U1.33 U2.29 U2.31 U2.45 U2.49 U3.2 U3.3 U3.6 U3.7 U4.5 U4.8 U4.10 U5.2 U6.2 X1.2 X1.4 | length 41.3
  Top Layer w0.15: U4.10 U4.5 ; U3.7 -8,-9.46 C36.1 ; v1(-6.5,12) v1@-6.46,12.04 ; v1(-5.5,10) v1@-5.45,10.05 ; C18.1 -4.035,12.04 U1.24 ; U1.13 -1.7,14.2 v1(-1.5,14) v1(-0.5,15) U1.10 ; C24.1 C24.1@-0.46,-16.765 ; U2.45 4.25,-14.5 v3(4.65,-14.1) U2.49 ; C28.1 C28.1@2.29,-8.46 ; C19.1 C19.1@2.75,17.775 ; C30.2 4.79,-9.54 5.05,-9.8 U2.31 5.05,-13.3 U2.49 ; U2.29 v3(5.85,-11.7) v3(5.85,-12.9) U2.49
  Top Layer w0.25: v1(-12,1.5) J1.3 ; v1(-12,3.5) J1.1 ; v1@-6.46,12.04 C17.1 C18.1 ; v1@-5.45,10.05 R15.1 ; v1(-4.5,10) -4.46,10 C21.1 ; C15.1 C16.1 -1.21,19.25 v1(-0.75,19.25) ; C22.1 C20.1 v1(0.25,19.25) ; C19.1@2.75,17.775 v1(2.75,19) ; v1(5.5,10) 5.54,9.96 C2.2 ; R9.2 v1(5.5,17.5) ; R11.2 v1(7.5,17.5) ; C3.1 8.46,9.96 v1(8.5,10) ; 12,10.75 12.5,10.75 R23.1
  Top Layer w0.5: C41.1 -11.96,9 U6.2
  other v1: -2.5,-18 -1.5,-18 11.5,-15.5 -5.5,-15.25 -11.75,-15 -0.75,-11 11.75,-10.5 -8.5,-7.5 3.75,-7.5 -4.25,-7 8,-5.5 9.75,-5.5 9.75,-3 10.75,-1.75 9.75,-0.5 10.75,0.75 9.75,2 10.75,3.25 10.75,5.5 -2.5,13 -1.5,13 -0.5,13 -2.5,14 -0.5,14 -2.5,15 -1.5,15
  other v3: 3.45,-15.3 4.65,-15.3 5.85,-15.3 7.05,-15.3 3.45,-14.1 5.85,-14.1 7.05,-14.1 3.45,-12.9 4.65,-12.9 7.05,-12.9 3.45,-11.7 4.65,-11.7 7.05,-11.7
  other v5: 12,-8.6
CTRL_ANT: C30.1 L3.1 U2.30 | length 2.6
  Top Layer w0.15: U2.30 5.45,-9.8 5.71,-9.54 C30.1
  Top Layer w0.35: C30.1 L3.1
CTRL_ANT_FEED: ANT1.1 C31.1 L3.2 | length 6.4
  Top Layer w0.35: L3.2 6.22,-6.5 C31.1
  Top Layer w0.5: C31.1 ANT1.1@11.85,-6.5
CTRL_DCC: L2.1 U2.47 | length 1.5
  Top Layer w0.15: L2.1 0.79,-15.3 U2.47
CTRL_DEC1: C27.2 U2.1 | length 3.2
  Top Layer w0.15: C27.2 0.96,-17.25 2.5,-17.25 3.05,-16.7 U2.1
CTRL_DEC2: C28.2 U2.32 | length 2.6
  Top Layer w0.15: C28.2@3.23,-8.48 4.65,-9.9 U2.32
CTRL_DEC3: C29.2 U2.33 | length 4.2
  Top Layer w0.15: C29.2 1.86,-9.15 3.476,-9.15 4.25,-9.924 U2.33
CTRL_DEC4: C23.2 L1.2 U2.46 | length 5.6
  Top Layer w0.15: C23.2@-3,-15.04 C23.2@-2.97,-15.01 ; L1.2@-1.75,-15.01 -1.75,-14.75 -1.5,-14.5 1.25,-14.5 1.65,-14.9 U2.46
  Top Layer w0.25: C23.2 -2.891,-15.01 L1.2
CTRL_RESET: U2.24
CTRL_SWDCLK: pad.@7.5,-9.25 U2.25 | length 2.5
  Top Layer w0.15: U2.25 8.225,-10.475 v1(8.25,-10.5)
  Bottom Layer w0.15: pad.@7.5,-9.25 8.25,-9.75 v1(8.25,-10.5)
CTRL_SWDIO: pad.@10,-9.25 U2.26 | length 4.8
  Top Layer w0.15: U2.26 7.05,-9.95 7.25,-9.75 8.5,-9.75 v1(9.25,-10.5)
  Bottom Layer w0.15: v1(9.25,-10.5) 9.25,-9.75 pad.@10,-9.25
CTRL_XC1: C33.2 U2.34 X1.3 | length 8.3
  Top Layer w0.15: C33.2 -2.21,-8.71 X1.3 -2.05,-8.618 -1.443,-9.225 -0.275,-9.225 -0.05,-9.45 3.351,-9.45 3.85,-9.949 U2.34
CTRL_XC2: C32.2 U2.35 X1.1 | length 7.8
  Top Layer w0.15: C32.2 -3.21,-10.75 -1.682,-10.75 -0.95,-10.018 X1.1 -0.75,-9.75 3.227,-9.75 3.45,-9.973 U2.35
CTRL_XL1: C35.2 U2.2 X2.2 | length 11.2
  Top Layer w0.15: C35.2 X2.2 -4.25,-17.5 -3,-18.75 -1,-18.75 -0.675,-18.425 1.075,-18.425 1.95,-17.55 2.95,-17.55 3.45,-17.05 U2.2
CTRL_XL2: C34.2 U2.3 X2.1 | length 14.3
  Top Layer w0.15: C34.2 -7.25,-16.5 X2.1 -6.25,-17 -5,-18.25 -3.924,-18.25 -3.124,-19.05 -0.876,-19.05 -0.551,-18.725 1.199,-18.725 2.074,-17.85 3.074,-17.85 3.85,-17.074 U2.3
IFACE_ERM+: U4.9 | length 1.6
  Top Layer w0.15: v4(-10.25,-15.75) -9.462,-14.962 -9.462,-14.5 U4.9@-9.462,-14.462
IFACE_ERM-: U4.6 | length 4.7
  Top Layer w0.15: v4(-13,-13.5) -12,-12.5 -10.25,-12.5 -9.75,-13 U4.6
  L1 w0.15: v4@-13,-14 v4(-13,-13.5)
IFACE_HAPTIC_EN: U2.43 U4.1 | length 10.1
  Top Layer w0.15: U4.1 -5,-14.5 -4.7,-14.2 1.3,-14.2 1.8,-13.7 U2.43
IFACE_HAPTIC_MODE: R20.1 R21.2 U4.3 | length 4.9
  Top Layer w0.15: R21.2 -8.45,-11.05 -7.525,-11.975 R20.1@-7.5,-12 ; U4.3 -7,-13.5 -6.75,-13.25 -6.75,-12.7 R20.1
IFACE_HAPTIC_PWM: U2.42 U4.2 | length 10.3
  Top Layer w0.15: U4.2 -7.23,-14 -7.03,-14.2 -5.124,-14.2 -4.824,-13.9 1.176,-13.9 1.776,-13.3 U2.42
IFACE_LED_BLE: D1.2 U2.40 | length 41.1
  Top Layer w0.15: v2(-2,-12.75) -1.45,-13.3 0.473,-13.3 1.273,-12.5 U2.40
  Top Layer w0.25: v1(11,10.5) 11.5,10 15.24,10 D1.2
  Bottom Layer w0.15: v2(-2,-12.75) -1.65,-13.1 1.4,-13.1 1.915,-12.585 1.915,-11.486 4.7,-8.701 4.7,-7.224 8.45,-3.474 8.45,2.874 9.2,3.624 9.2,5.526 10.55,6.876 10.55,10.05 v1(11,10.5)
IFACE_LED_CHG: D3.2 U2.39 | length 39.5
  Top Layer w0.15: v2(-1.25,-12.5) -0.75,-13 0.349,-13 1.249,-12.1 U2.39 ; D3.2@10.495,15.745 D3.2
  Top Layer w0.25: v1(9.75,15) D3.2@10.495,15.745
  Bottom Layer w0.15: v2(-1.25,-12.5) -0.95,-12.8 1.25,-12.8 ; 1.276,-12.8 1.615,-12.461 1.615,-11.362 4.4,-8.577 4.4,-7.1 8.15,-3.35 8.15,2.999 8.9,3.749 8.9,5.65 10.25,7 10.25,14.5 v1(9.75,15)
IFACE_LED_PWR: D2.2 U2.41 | length 42.4
  Top Layer w0.15: v2(-2.75,-13) -2.15,-13.6 0.597,-13.6 1.297,-12.9 U2.41
  Top Layer w0.25: D2.2 14.24,12.75 v1(14.25,12.75)
  Bottom Layer w0.15: v2(-2.75,-13) -2.35,-13.4 1.524,-13.4 2.215,-12.709 2.215,-11.611 5,-8.826 5,-7.349 8.75,-3.599 8.75,2.75 9.5,3.5 9.5,5.401 10.85,6.751 10.85,9.35 v1(14.25,12.75)
IFACE_ONOFF: R22.1 S1.2 S1.4 U2.38 | length 43.6
  Top Layer w0.15: R22.1 -15.773,9.45 -15.094,8.771 -15.094,5.094 -14.5,4.5 v1(-11,4.5) ; v2(-2.75,-12) -2.25,-12 -2,-11.75 -1.174,-11.75 -0.224,-12.7 0.224,-12.7 1.224,-11.7 U2.38
  Top Layer w0.25: R22.1 -16,10.227 S1.2 S1.4
  Bottom Layer w0.15: v1(-11,4.5) -11,-0.651 -8.201,-3.45 -7.626,-3.45 -6.7,-4.376 -6.7,-5.527 -6.175,-6.052 -6.175,-6.976 -5.626,-7.525 -4.626,-7.525 -3.9,-8.251 -3.9,-10.85 v2(-2.75,-12)
IMU_CS: U2.4 U3.12 | length 36.9
  Top Layer w0.15: v1(-14,-4.5) -9.5,-4.5 -8,-6 U3.12 ; v2(0,-19.25) 1.099,-19.25 2.199,-18.15 3.199,-18.15 4.25,-17.099 U2.4
  Bottom Layer w0.15: v1(-14,-4.5) -13.55,-4.95 -13.55,-10.7 -9,-15.25 -9,-16.25 -7.05,-18.2 -4.224,-18.2 -3.174,-19.25 v2(0,-19.25)
IMU_INT1: U2.6 U3.4 | length 27.6
  Top Layer w0.15: v1(-11.5,-8.5) -9.95,-8.5 U3.4 ; v2(3.25,-19) 5.05,-17.2 U2.6
  Bottom Layer w0.15: v1(-11.5,-8.5) -11.5,-8.3 -11.525,-8.275 -11.525,-11.876 -8.4,-15.001 -8.4,-16.001 -6.801,-17.6 -3.976,-17.6 -2.926,-18.65 -0.9,-18.65 -0.5,-18.25 0.174,-18.25 0.624,-18.7 2.45,-18.7 2.75,-19 v2(3.25,-19)
IMU_INT2: U2.5 U3.9 | length 41.9
  Top Layer w0.15: v1(-14,-3.5) -13.3,-4.2 -9.376,-4.2 -7.576,-6 -7,-6 -6.5,-6.5 -6.5,-7.5 -6.75,-7.75 U3.9 ; v2(2,-19.25) 2.8,-18.45 3.323,-18.45 4.65,-17.123 U2.5
  Bottom Layer w0.15: v1(-14,-3.5) -13.25,-4.25 -13.25,-10.576 -8.7,-15.126 -8.7,-16.126 -6.926,-17.9 -4.1,-17.9 -3.05,-18.95 -0.776,-18.95 -0.376,-18.55 0.05,-18.55 0.75,-19.25 v2(2,-19.25)
IMU_SCL: U2.9 U3.13 | length 31.5
  Top Layer w0.15: v1(-11,-5.5) -9,-5.5 -8.5,-6 U3.13 ; v2(6.25,-18.25) U2.9
  Bottom Layer w0.15: v1(-11,-5.5) -11,-5.47 -10.2,-6.27 -10.2,-8.201 -9.6,-8.801 -9.6,-12.529 -7.5,-14.629 -7.5,-15.629 -6.429,-16.7 -0.103,-16.7 0.997,-17.8 5.8,-17.8 v2(6.25,-18.25)
IMU_SDI: U2.8 U3.14 | length 29.4
  Top Layer w0.15: v1(-11,-6.5) -10.5,-6 -9.55,-6 U3.14 ; v2(5.25,-18.5) 5.25,-18 5.85,-17.4 U2.8
  Bottom Layer w0.15: v1(-11,-6.5) -10.5,-7 -10.5,-8.326 -9.9,-8.926 -9.9,-12.653 -7.8,-14.753 -7.8,-15.753 -6.553,-17 -0.227,-17 0.873,-18.1 4.85,-18.1 v2(5.25,-18.5)
IMU_SDO: U2.7 U3.1 | length 28.2
  Top Layer w0.15: v1(-11.5,-7.625) -11.375,-7.625 -11.25,-7.75 -10.25,-6.75 U3.1 ; v2(4.25,-18.75) 4.25,-18.5 5.45,-17.3 U2.7
  Bottom Layer w0.15: v1(-11.5,-7.625) -11.5,-7.75 -10.2,-9.05 -10.2,-12.777 -8.1,-14.877 -8.1,-15.877 -6.677,-17.3 -0.351,-17.3 0.749,-18.4 3.4,-18.4 3.75,-18.75 v2(4.25,-18.75)
NetC1_1: C1.1 C2.1 C4.1 R1.1 | length 3.2
  Top Layer w0.25: R1.1 C1.1 6.54,8.92 C2.1 6.46,10 C4.1
NetC1_2: C1.2 C3.2 C5.1 R2.1 | length 3.2
  Top Layer w0.25: R2.1 7.5,7.96 C1.2 7.46,8.92 C3.2 7.54,10 C5.1
NetC6_2: C6.2 R5.2 U1.28 | length 3.4
  Top Layer w0.15: R5.2 R5.2@-3.49,9.96 ; C6.2 -1.7,10.76 U1.28
  Top Layer w0.25: R5.2@-3.49,9.96 C6.2
NetC7_1: C7.1 C9.2 C11.2 | length 2.8
  Top Layer w0.25: C11.2 3.46,9.46 3.96,9.96 C7.1 C9.2
NetC8_2: C8.2 C10.2 C12.1 | length 11.4
  Top Layer w0.25: C12.1 3.04,10.04 3.5,10.5 v1(3.5,11) ; C10.2 8.5,7.96 C8.2 9.46,6.96 v1(9.5,7)
  Bottom Layer w0.25: v1(3.5,11) 5.5,11 v1(9.5,7)
NetC11_1: C11.1 R12.2 | length 1.8
  Top Layer w0.25: R12.2 1.45,9.55 2,9 C11.1
NetC12_2: C12.2 R13.2 | length 1.1
  Top Layer w0.25: R13.2 2.5,11 C12.2@2.54,11
NetC13_1: C13.1 U1.2 | length 2.5
  Top Layer w0.15: U1.2 2,13 2.46,12.54 C13.1
NetC13_2: C13.2 U1.1 | length 1.2
  Top Layer w0.15: U1.1 0.825,12.25 C13.2
NetC14_1: C14.1 U1.8 | length 1.2
  Top Layer w0.15: U1.8 0.825,15.75 C14.1
NetC14_2: C14.2 U1.7 | length 2.5
  Top Layer w0.15: U1.7 2,15 2.46,15.46 C14.2
NetD1_1: D1.1 R23.2 | length 1.3
  Top Layer w0.25: R23.2 14.432,11.818 D1.1
NetD2_1: D2.1 R24.2 | length 1.2
  Top Layer w0.25: R24.2 11.693,11.693 D2.1
NetD3_1: D3.1 R25.2 | length 1.1
  Top Layer w0.25: D3.1 11.631,14.755 R25.2
NetL1_1: L1.1 L2.2 | length 1.6
  Top Layer w0.15: L1.1 -1.48,-15.99 L2.2
NetR6_2: R6.2 U1.29 | length 2.2
  Top Layer w0.15: R6.2 -1.3,10.15 U1.29
NetR7_1: R7.1 U1.30 | length 2.2
  Top Layer w0.15: U1.30 -0.9,10.35 R7.1
NetR12_1: R12.1 U1.31 | length 2.5
  Top Layer w0.15: U1.31 -0.5,11.05 R12.1
NetR13_1: R13.1 U1.32 | length 1.6
  Top Layer w0.15: U1.32 -0.1,11.35 0.4,10.85 R13.1
PWR_CHRG_STAT: J1.4 R16.1 U2.37 | length 26.9
  Top Layer w0.15: v1(-12,0.5) J1.4 ; R16.1 v2(-3.75,-12) -3.2,-11.45 -1.05,-11.45 -0.1,-12.4 0.1,-12.4 1.2,-11.3 U2.37
  Bottom Layer w0.15: v1(-12,0.5) -12,-0.076 -8.326,-3.75 -7.75,-3.75 -7,-4.5 -7,-5.651 -6.475,-6.176 -6.475,-7.101 -5.751,-7.825 -4.751,-7.825 -4.2,-8.376 -4.2,-11.55 v2(-3.75,-12)
PWR_FG_GPOUT: J1.7 R19.1 U2.23 | length 32.1
  Top Layer w0.15: J1.7 -9,-2.5 -8.5,-3 -8.5,-4 v1(-7.75,-4.75) ; R19.1 v1(-3.75,-13) ; U2.23 9.05,-11.7 9.25,-11.5 v2(9.5,-11.5)
  Bottom Layer w0.15: v1(-7.75,-4.75) -7.75,-5.326 -7.349,-5.727 -6.775,-6.301 -6.775,-7.225 -5.875,-8.125 -4.875,-8.125 -4.5,-8.5 -4.5,-12.25 v1(-3.75,-13) -3.05,-13.7 1.649,-13.7 2.515,-12.833 2.515,-11.735 3.25,-11 7.25,-11 7.75,-11.5 v2(9.5,-11.5)
PWR_FG_SCL: J1.6 R18.1 U2.21 | length 38.3
  Top Layer w0.15: J1.6 -9,-1.5 -8.5,-2 -8.5,-2.576 -8.2,-2.876 -8.2,-3.55 -7,-4.75 -7,-5.576 -6.2,-6.376 -6.2,-8.7 v1(-6.25,-8.75) -6.25,-9.25 R18.1@-5.75,-9.75 ; U2.21 10.75,-12.5 v2(11.5,-13.25)
  Bottom Layer w0.15: v1(-6.25,-8.75) -7.2,-9.7 -7.2,-11.535 -5.435,-13.3 -4.753,-13.3 -3.753,-14.3 1.897,-14.3 2.697,-13.5 8.735,-13.5 9.285,-12.95 9.8,-12.95 10.25,-12.5 10.75,-12.5 v2(11.5,-13.25)
PWR_FG_SDA: J1.5 R17.1 U2.22 | length 37.6
  Top Layer w0.15: J1.5 -9,-0.5 -8.2,-1.3 -8.2,-2.451 -7.9,-2.751 -7.9,-3.426 -6.7,-4.626 -6.7,-5.451 -5.9,-6.251 -5.9,-7.749 ; -5.9,-7.75 -5.9,-8.1 v1(-5.25,-8.75) -5.25,-9.25 R17.1@-4.75,-9.75 ; U2.22 11.35,-12.1 v2(11.5,-12.25)
  Bottom Layer w0.15: v1(-5.25,-8.75) -5.25,-12.379 -3.629,-14 1.773,-14 2.815,-12.958 2.815,-12.685 3.155,-12.345 9.655,-12.345 10.25,-11.75 11,-11.75 v2(11.5,-12.25)
VDD: C17.2 C18.2 C24.2 C25.2 C26.2 C36.2 C37.2 C38.2 C40.2 pad.@7.5,-7.25 R14.2 R16.2 R17.2 R18.2 R19.2 R20.2 R22.2 U1.23 U2.13 U2.36 U2.48 U3.5 U3.8 U4.7 U5.5 | length 32.5
  Top Layer w0.15: v1(-16,7.5) R22.2 ; v1(-11.75,-14.125) -10.957,-13.332 -10.875,-13.415 C38.2@-10.75,-13.54 ; C38.2 -10.54,-13.5 U4.7 ; C37.2 -9.96,-9.41 U3.5 ; R20.2 -7.3,-11.25 v1(-6.5,-11.25) v1@-6.45,-11.25 ; U3.8 -7.04,-8.51 C36.2 ; v1@-6.5,-11.2 v1@-6.45,-11.25 ; v1(-6.5,13) v1@-6.46,12.96 ; v1(-6.5,18) R14.2 ; v1@-6.3,-11.25 R18.2 R17.2 ; R19.2 R16.2 v1@-6.45,-11.25 ; C18.2 -4.46,13 U1.23 ; v1(0.25,-11.5) 0.333,-11.5 1.21,-10.623 C25.2 1.235,-10.475 U2.36 ; C24.2 C24.2@0.975,-16.25 ; v1(1.75,-16.25) C24.2@0.975,-16.25 ; U2.48 1.525,-15.7 C24.2@0.975,-16.25 ; U2.13@8.285,-15.71 U2.13 9.49,-15.7 C26.2 9.54,-16.71 v1(9.5,-16.75)
  Top Layer w0.25: C40.2 -10.21,-10.46 -9.96,-10.21 C37.2 ; C36.2 -6.5,-10.04 v1@-6.5,-11.2 ; v1@-6.46,12.96 C17.2 C18.2
  Top Layer w0.5: U5.5 -11.635,-10.46 C40.2 v1(-11,-11.5)
  Bottom Layer w0.15: pad.@7.5,-7.25 7.75,-7.25 v1(8.75,-8.25)
VDD_AFE: C15.2 C16.2 C42.2 R8.2 R10.2 U1.12 U6.5 | length 9.1
  Top Layer w0.15: C16.2 -1.75,17 -1.3,16.55 U1.12
  Top Layer w0.25: v1(-3.75,17.75) -3.71,17.79 C15.2 C16.2 ; R8.2 v1(4.5,17.5) ; R10.2 v1(6.5,17.5)
  Top Layer w0.5: U6.5 -8.54,10.865 C42.2 v1(-7.5,11.5)
VSYS: C39.2 C41.2 J1.8 U5.1 U5.3 U6.1 U6.3 | length 16.7
  Top Layer w0.25: v1(-12.75,-3.5) J1.8
  Top Layer w0.5: v1(-16,-7.5) C39.2 -14.535,-8.54 U5.3 -14.45,-9.55 -14,-10 -13,-10 -12.55,-9.55 U5.1 ; v1(-13.25,8.5) -12.79,8.04 C41.2 -11.99,8.05 U6.3 -9.45,8.05 -9,8.5 -9,9.5 -9.45,9.95 U6.1
pads on no net: J1. U2.14 U2.15 U2.16 U2.27 U2.28 U2.44 U3.10 U3.11 U4.4 U5.4 U6.4
copper on no net:
  other v6: -9,5.5

## Polygon pours and split planes (outlines as drawn)
AGND on L1 "L1_GND" (solid, pour order 22): -10.536,17 cw(c0,0) 18.688,7.125 7,7.125 6.912,7.089 6.912,7.088 6.911,7.088 -0.088,0.089 -0.088,0.088 -0.089,0.088 -0.125,0 0.088,-0.089 0.088,-0.088 0.089,-0.088 7.052,6.875 18.781,6.875 cw(c0,0) 20,0 cw(c0,0) -17,-10.536 -17,10.536
AGND on Bottom Layer "BOT_GND" (solid, pour order 29): -10.536,17 cw(c0,0) 18.688,7.125 7,7.125 6.912,7.089 6.912,7.088 6.911,7.088 -0.088,0.088 -0.089,0.088 0.088,-0.089 0.088,-0.088 7.052,6.875 18.781,6.875 cw(c0,0) 20,0 cw(c0,0) -17,-10.536 -17,10.536
AGND on Top Layer "TOP_GND" (solid, pour order 27): -10.536,17 cw(c0,0) 18.688,7.125 7,7.125 6.912,7.089 6.912,7.088 6.911,7.088 -0.088,0.088 -0.089,0.088 0.088,-0.089 0.088,-0.088 7.052,6.875 18.781,6.875 cw(c0,0) 20,0 cw(c0,0) -17,-10.536 -17,10.536
VDD on L2 "L2_VDD" (solid, pour order 23): -13.036,-10.661 -12.947,-10.624 -11.912,-9.589 -11.912,-9.588 -11.875,-9.5 -11.875,8.5 -11.912,8.588 -11.912,8.589 -12.661,9.338 -12.662,9.338 -12.75,9.375 -13.75,9.375 -13.838,9.338 -13.839,9.338 -14.588,8.589 -14.588,8.588 -14.625,8.5 -14.625,5.552 -15.552,4.625 -17,4.625 -17,10.536 -10.536,17 cw(c0,0) -5.375,19.264 -5.375,12.802 -5.802,12.375 -7.75,12.375 -7.838,12.339 -7.838,12.338 -7.839,12.338 -8.338,11.839 -8.338,11.838 -8.339,11.838 -8.375,11.75 -8.375,4.5 -8.339,4.412 -8.338,4.412 -8.338,4.411 -3.839,-0.088 -3.838,-0.088 -3.838,-0.089 -3.75,-0.125 0,-0.125 0.088,-0.089 0.088,-0.088 0.089,-0.088 7.052,6.875 18.781,6.875 cw(c0,0) 20,0 cw(c0,0) -16.922,-10.661
VDD_AFE on L2 "L2_VDD" (solid, pour order 24): -8.125,4.552 -3.698,0.125 -0.052,0.125 6.911,7.088 6.912,7.088 6.912,7.089 7,7.125 18.688,7.125 ccw(c0,0) -5.125,19.332 -5.125,12.75 -5.161,12.662 -5.162,12.662 -5.162,12.661 -5.661,12.162 -5.662,12.162 -5.662,12.161 -5.75,12.125 -7.698,12.125 -8.125,11.698
VSYS on L2 "L2_VDD" (solid, pour order 25): -15.5,4.375 -15.412,4.412 -15.411,4.412 -14.412,5.411 -14.412,5.412 -14.375,5.5 -14.375,8.448 -13.698,9.125 -12.802,9.125 -12.125,8.448 -12.125,-9.448 -13.087,-10.411 -17,-10.411 -17,4.375

## Other copper
Top Layer:
  pour cut-out: 12.25,-20 20,-20 20,20 12.25,20
  pour cut-out: 0,13.25 2.5,13.25 3,12.75 3,11.75 0.5,11.75 0,12.25
  pour cut-out: 0,14.75 2.5,14.75 3,15.25 3,16.25 0.5,16.25 0,15.75
L1:
  pour cut-out: 12.25,-20 20,-20 20,20 12.25,20
  pour cut-out: 0,14.75 2.5,14.75 3,15.25 3,16.25 0.5,16.25 0,15.75
  pour cut-out: 0,13.25 2.5,13.25 3,12.75 3,11.75 0.5,11.75 0,12.25
L2:
  pour cut-out: 12.25,-20 20,-20 20,20 12.25,20
  pour cut-out: 0,14.75 2.5,14.75 3,15.25 3,16.25 0.5,16.25 0,15.75
  pour cut-out: 0,13.25 2.5,13.25 3,12.75 3,11.75 0.5,11.75 0,12.25
Bottom Layer:
  pour cut-out: 12.25,-20 20,-20 20,20 12.25,20
  pour cut-out: 0,14.75 2.5,14.75 3,15.25 3,16.25 0.5,16.25 0,15.75
  pour cut-out: 0,13.25 2.5,13.25 3,12.75 3,11.75 0.5,11.75 0,12.25

## Silkscreen, mask and mechanical layers (free items; w line width, h text height)
Bottom Overlay:
  text "VDD" at 6.125,-7.5 h1
  text "GND" at 13.25,-7.5 h1
  text "SWCLK" at 6.125,-9.5 h1
  text "SWDIO" at 14.3,-9.5 h1
  text "ERM/LRA-" at -7.7,-13.875 h1
  text "ERM/LRA+" at -4.75,-16.125 h1
Mechanical 1:
  the board outline again, w0.25